# Altium PCB sai.PcbDoc
Units mm, origin at the board's own origin, x right, y up, seen from the top; angles counter-clockwise.
Board outline 152.4 x 101.6 mm, 2 copper layers (Top Layer, Bottom Layer); 31 components, 21 nets, 116 pads, 0 vias.
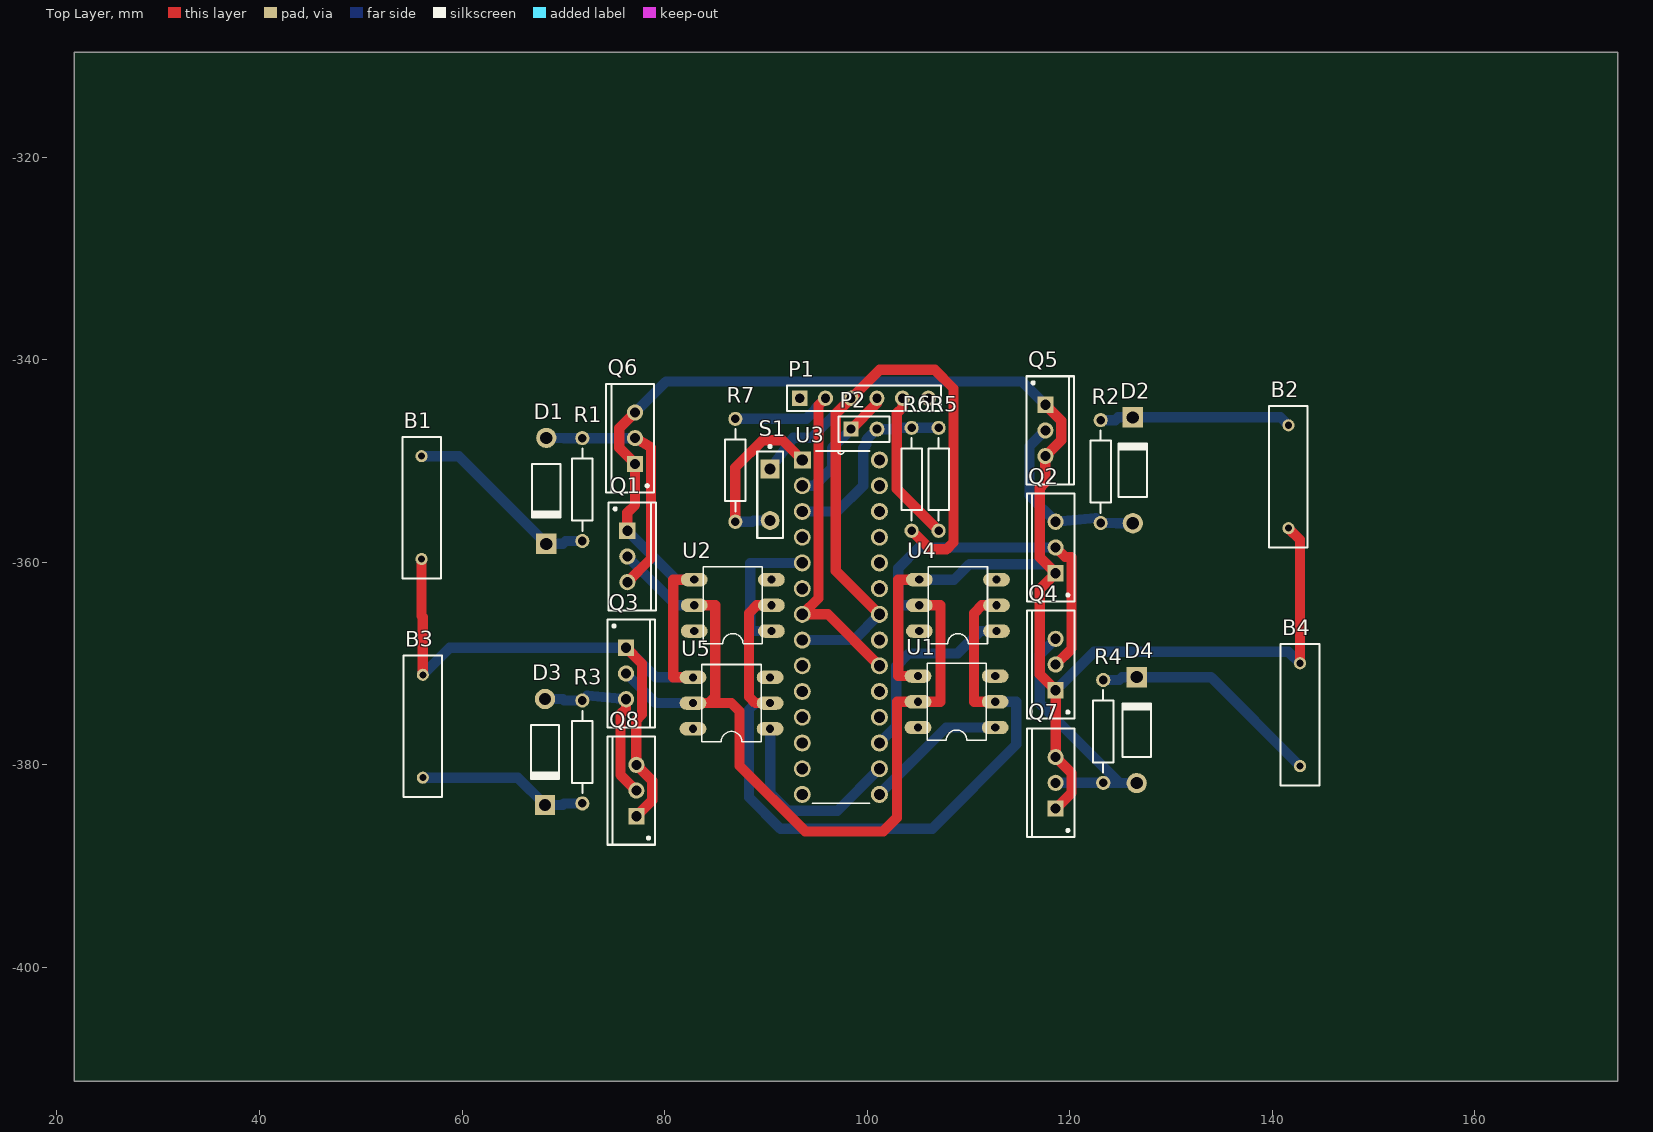
[diagram p0: Top Layer view]
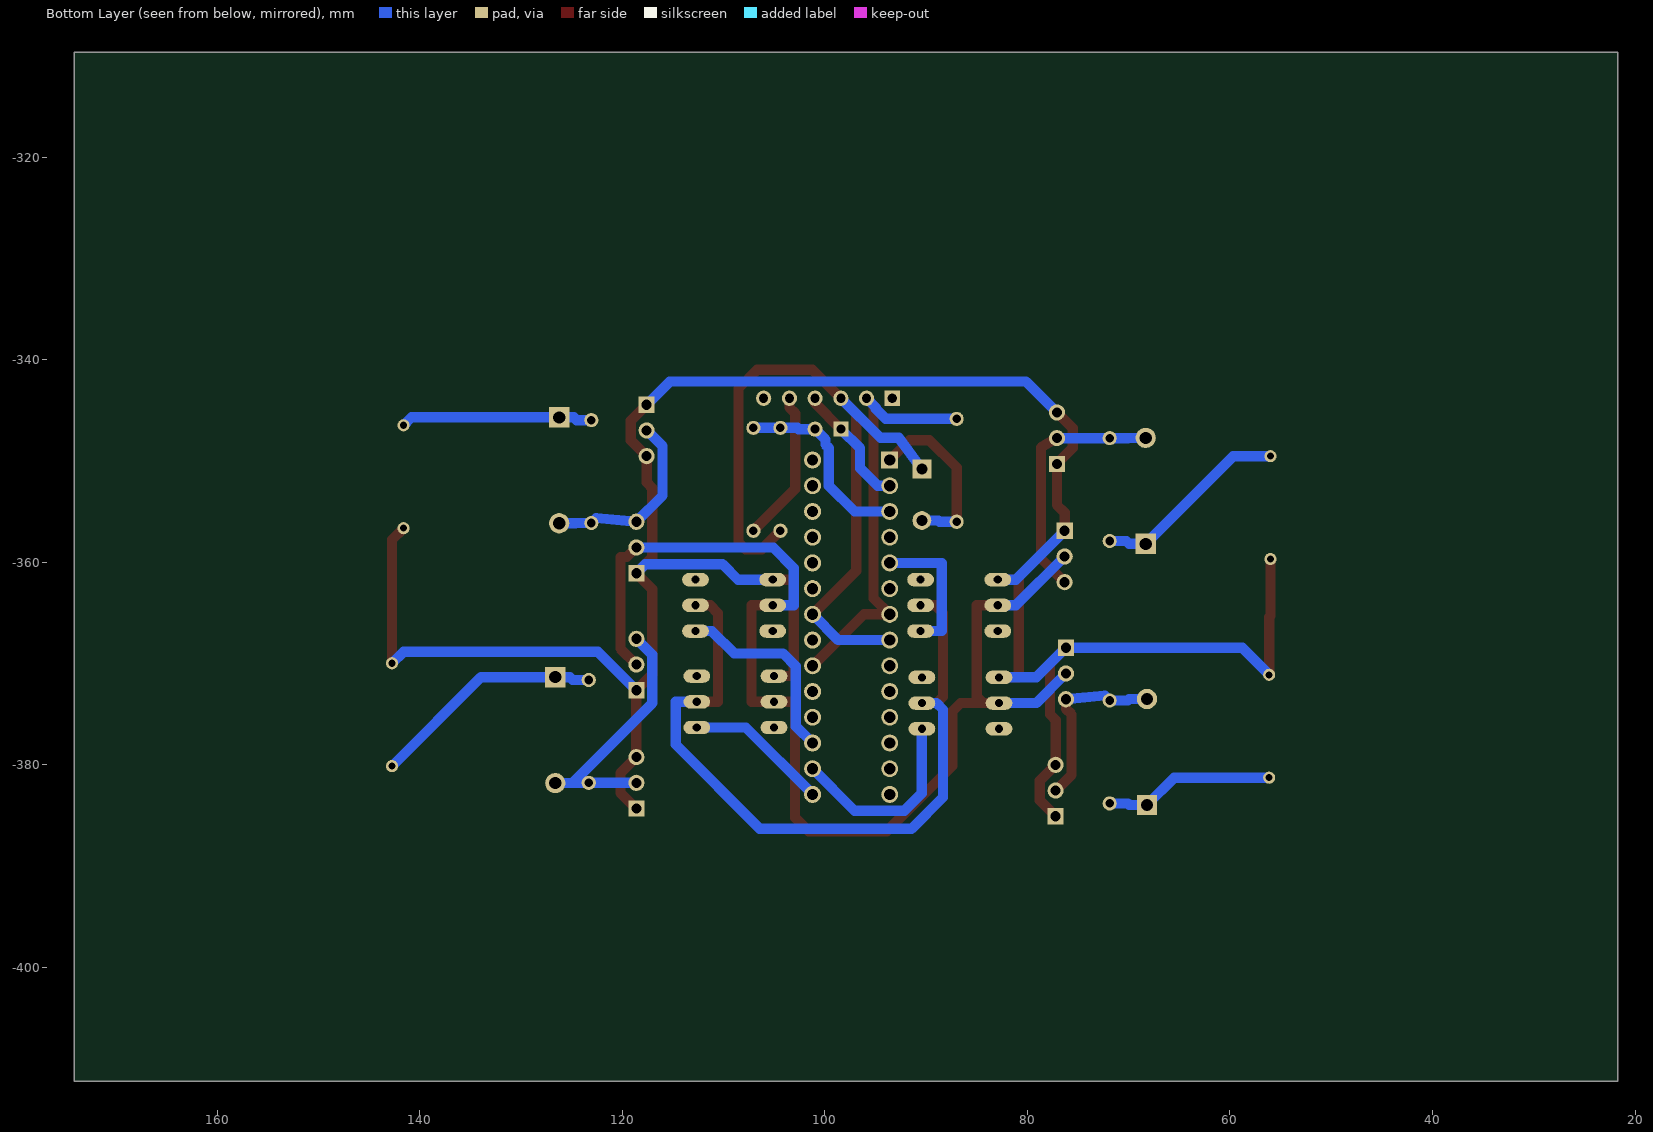
[diagram p1: Bottom Layer view, seen from below]

## Layer stack, top to bottom
Top Solder: solder mask 0.0102, Solder Resist, Dk 3.5
Top Layer: signal copper 0.0356
Dielectric 1: dielectric 0.32, FR-4, Dk 4.8
Bottom Layer: signal copper 0.0356
Bottom Solder: solder mask 0.0102, Solder Resist, Dk 3.5

## Board outline
21.717,-411.226 174.117,-411.226 174.117,-309.626 21.717,-309.626

## Design rules (kind name [scope] priority, off if disabled: settings)
Clearance [All] p1: gap=0.254 ignorepadtopadclearanceinfootprint=FALSE except(0: Arc-Hole Track-Hole SMDPad-Hole THPad-Hole Via-Hole Fill-Hole Poly-Hole Region-Hole Text-Hole)
DiffPairsRouting [All] p1: maxlimit=1 minlimit=0.5 mostfreqgap=0.75 toplayer_minwidth=1 toplayer_maxwidth=2 toplayer_prefwidth=2 bottomlayer_minwidth=1 bottomlayer_maxwidth=2 bottomlayer_prefwidth=2 maxuncoupledlength=12.7
PolygonConnect [All] p1: connectstyle=Relief reliefconductorwidth=0.254 reliefentries=4 polygonreliefangle="90 Angle" airgapwidth=0.254
RoutingVias [All] p1: holewidth=0.711 width=1.27 viastyle="Through Hole" minholewidth=0.711 minwidth=1.27 maxholewidth=0.711 maxwidth=1.27
SolderMaskExpansion [All] p1: expansion=0.102
Width [All] p1: maxlimit=1.016 minlimit=1.016 preferedwidth=1.016
29 further rules are at their usual default settings.

## Components (designator, comment, footprint, x,y, rotation, side; value= is the part's Value field where it differs from the comment)
B1 "Motor Servo" RAD-0.4 56.007,-354.584 r270 top
B2 "Motor Servo" RAD-0.4 141.605,-351.536 r90 top
B3 "Motor Servo" RAD-0.4 56.134,-376.174 r270 top
B4 "Motor Servo" RAD-0.4 142.748,-375.031 r90 top
D1 "Diode 1N4007" DO-41 68.326,-352.933 r270 top
D2 "Diode 1N4007" DO-41 126.238,-350.901 r90 top
D3 "Diode 1N4007" DO-41 68.199,-378.714 r270 top
D4 "Diode 1N4007" DO-41 126.619,-376.555 r90 top
P1 "Header 6" HDR1X6 93.345,-343.789 r0 top
P2 "Header 2" HDR1X2 98.425,-346.837 r0 top
Q1 "PMOS-2" TO-220AB 76.327,-359.41 r270 top
Q2 "PMOS-2" TO-220AB 118.618,-358.521 r90 top
Q3 "PMOS-2" TO-220AB 76.2,-370.967 r270 top
Q4 "PMOS-2" TO-220AB 118.618,-370.078 r90 top
Q5 "NMOS-2" TO-220AB 117.602,-346.964 r270 top
Q6 "NMOS-2" TO-220AB 77.089,-347.726 r90 top
Q7 "NMOS-2" TO-220AB 118.618,-381.762 r90 top
Q8 "NMOS-2" TO-220AB 77.216,-382.524 r90 top
R1 "Res2" AXIAL-0.4 71.882,-352.806 r90 top value=1K
R2 "Res2" AXIAL-0.4 123.063,-351.028 r90 top value=1K
R3 "Res2" AXIAL-0.4 71.882,-378.714 r90 top value=1K
R4 "Res2" AXIAL-0.4 123.317,-376.682 r90 top value=1K
R5 "Res2" AXIAL-0.4 107.061,-351.79 r270 top value=1K
R6 "Res2" AXIAL-0.4 104.394,-351.79 r90 top
R7 "Res2" AXIAL-0.4 86.995,-350.901 r90 top value=1K
S1 "SW-PB" SPST-2 90.424,-353.314 r270 top
U1 "4N35" *DIL06 108.839,-373.761 r90 top
U2 "4N35" *DIL06 86.741,-364.236 r90 top
U3 "ATMEGA328P-PU" *DIP254P762X457-28 101.219,-382.905 r0 top
U4 "4N35" *DIL06 108.966,-364.236 r90 top
U5 "4N35" *DIL06 86.614,-373.888 r90 top

## Footprints (in the part's own frame and the unit in brackets; to place one, negate y for a bottom-side part, rotate by r counter-clockwise, add the part's x,y. Pads: shape width x height; smd on the part's side, far side on the other; paste and mask are expansions set on the pad)
*DIL06 [mil]
  oval 52x104 hole 32: 1(-100,-150) 2(0,-150) 3(100,-150) 4(100,150) 5(0,150) 6(-100,150)
  silkscreen extent -150,-115 150,115
*DIP254P762X457-28 [mil]
  rect 66x66 hole 44: 1(-300,1300)
  round 66 hole 44: 2(-300,1200) 3(-300,1100) 4(-300,1000) 5(-300,900) 6(-300,800) 7(-300,700) 8(-300,600) 9(-300,500) 10(-300,400) 11(-300,300) 12(-300,200) 13(-300,100) 14(-300,0) 15(0,0) 16(0,100) 17(0,200) 18(0,300) 19(0,400) 20(0,500) 21(0,600) 22(0,700) 23(0,800) 24(0,900) 25(0,1000) 26(0,1100) 27(0,1200) 28(0,1300)
  silkscreen extent -262,-35 -38,1335
AXIAL-0.4 [mm] "Axial Device, Thru-Hole; 2 Leads; 0.4 in Pin Spacing"
  round 1.4 hole 0.85: 1(-5.08,0) 2(5.08,0)
  silkscreen extent -4.06,-1.02 4.06,1.02
DO-41 [mm] "Diode, Axial; Body 5.2 x 2.7 mm (LxDia. max), Lead Dia. 0.86 mm (max)"
  round 2 hole 1.2: 1(-5.23,0)
  rect 2x2 hole 1.2: 2(5.23,0)
  silkscreen extent -2.65,-1.4 2.75,1.4
HDR1X2 [mm] "Connector; Header; 2 Position"
  rect 1.5x1.5 hole 0.9: 1(0,0)
  round 1.5 hole 0.9: 2(2.54,0)
  silkscreen extent -1.27,-1.27 3.81,1.27
HDR1X6 [mm] "Connector; Header; 6 Position"
  rect 1.5x1.5 hole 0.9: 1(0,0)
  round 1.5 hole 0.9: 2(2.54,0) 3(5.08,0) 4(7.62,0) 5(10.16,0) 6(12.7,0)
  silkscreen extent -1.27,-1.27 13.97,1.27
RAD-0.4 [mm] "Radial Cap, Thru-Hole; 2 Leads; 0.4 in Pin Spacing"
  round 1.2 hole 0.7: 1(-5.08,0) 2(5.08,0)
  silkscreen extent -6.98,-1.91 6.98,1.91
SPST-2 [mm] "Switch; 2 Leads"
  rect 1.85x1.85 hole 1.1: 1(-2.54,0)
  round 1.85 hole 1.1: 2(2.54,0)
  silkscreen extent -4.89,-1.27 4.28,1.27
TO-220AB [mm] "TO, Thru-Hole, Vertical, Heatsink Mounted; 3 In-Line Leads; Pitch 2.54 mm"
  rect 1.6x1.6 hole 1: 1(-2.54,0)
  round 1.6 hole 1: 2(0,0) 3(2.54,0)
  silkscreen extent -5.35,-1.85 5.35,2.85, body extent -5.4,-1.9 5.4,2.9, height 19.3

## Part data
B1 B2 B3 B4: "Servo Motor", LatestRevisionDate=17-Jul-2002, LatestRevisionNote="Re-released for DXP Platform.", PackageDescription="Radial Cap, Thru-Hole; 2 Leads; 0.4 in Pin Spacing", PackageReference=RAD-0.4, Published=24-Mar-1999, Publisher="Altium Limited"
D1 D2 D3 D4: "1 Amp General Purpose Rectifier", Code_JEDEC=DO-204-AL, ComponentLink1Description="Manufacturer Link", ComponentLink1URL=http://www.fairchildsemi.com/, ComponentLink2Description=Datasheet, ComponentLink2URL=http://www.fairchildsemi.com/ds/1N%2F1N4001.pdf, DatasheetVersion=1998, LatestRevisionDate=17-Jul-2002, LatestRevisionNote="Re-released for DXP Platform.", PackageDescription="Diode, Axial; Body 5.2 x 2.7 mm (LxDia. max), Lead Dia. 0.86 mm (max)", PackageReference=DO-41, PackageVersion=Aug-1999, Published=8-Jun-2000, Publisher="Altium Limited"
P1: "Header, 6-Pin", LatestRevisionDate=17-Jul-2002, LatestRevisionNote="Re-released for DXP Platform.", Publisher="Altium Limited"
P2: "Header, 2-Pin", LatestRevisionDate=17-Jul-2002, LatestRevisionNote="Re-released for DXP Platform.", Publisher="Altium Limited"
Q1 Q2 Q3 Q4: "P-Channel Power MOSFET", ComponentLink1Description="Manufacturer Link", ComponentLink1URL=http://www.irf.com/, DatasheetVersion=PD-9.390D, LatestRevisionDate=17-Jul-2002, LatestRevisionNote="Re-released for DXP Platform.", Note="Pin 4 not drawn and electrically connected to Pin 2.", PackageDescription="TO, Thru-Hole, Vertical, Heatsink Mounted; 3 In-Line Leads; Pitch 2.54 mm", PackageReference=TO-220AB, PackageVersion=Feb-1997, Published=8-Jun-2000, Publisher="Altium Limited"
Q5 Q6 Q7 Q8: "N-Channel Power MOSFET", ComponentLink1Description="Manufacturer Link", ComponentLink1URL=http://www.irf.com/, DatasheetVersion=PD-9.814, LatestRevisionDate=17-Jul-2002, LatestRevisionNote="Re-released for DXP Platform.", Note="Pin 2 is electrically connected to pin 4.", PackageDescription="TO, Thru-Hole, Vertical, Heatsink Mounted; 3 In-Line Leads; Pitch 2.54 mm", PackageReference=TO-220AB, PackageVersion=Feb-1997, Published=8-Jun-2000, Publisher="Altium Limited"
R1 R2 R3 R4 R5 R6 R7: "Resistor", LatestRevisionDate=17-Jul-2002, LatestRevisionNote="Re-released for DXP Platform.", PackageDescription="Axial Device, Thru-Hole; 2 Leads; 0.4 in Pin Spacing", PackageReference=AXIAL-0.4, Published=8-Jun-2000, Publisher="Altium Limited"
S1: "Switch", LatestRevisionDate=17-Jul-2002, LatestRevisionNote="Re-released for DXP Platform.", PackageDescription="Switch; 2 Leads", PackageReference=SPST-2, Published=24-Mar-1999, Publisher="Altium Limited"
U1 U2 U4 U5: "Optoisolator; Analog; 6-Pin DIP; Transistor; 6 PIN SINGLE; 100% CTR;", Package="DIP-6 Infineon", Availability=Unavailable, MF="Vishay Semiconductor", MP=4N35, Price=None, SnapEDA_Link=https://www.snapeda.com/parts/4N35/Vishay%20Semiconductor%20Opto%20Division/view-part/?ref=snap
U3: "Embedded microcontroller ATMEGA328P-PU PDIP 28 Microchip Technology 8-Bit 20 MHz I/O number 23", Package="PDIP-28 Microchip", Availability=Unavailable, MF=Microchip, MP=ATMEGA328P-PU, Price=None, SnapEDA_Link=https://www.snapeda.com/parts/ATMEGA328P-PU/Microchip/view-part/?ref=snap

## Nets (pads, with @x,y where several pads share a name; then routed paths per layer and width w, separated by ;. In a path a pad name is that pad's centre, name@x,y a point inside that pad or via, vN(x,y) a via of type N, cw(c..) or ccw(c..) an arc to the next point about the centre after c; other vN are vias at no path point)
NetB1_1: B1.1 D1.2 R1.1 | length 19.6
  Bottom Layer w1.016: B1.1 59.667,-349.504 D1.2 69.952,-358.163 70.229,-357.886 R1.1
NetB1_2: B1.2 B2.1 B3.1 B4.2 Q1.1 Q2.1 Q3.1 Q4.1 Q5.1 Q5.3 Q6.1 Q6.3 Q7.1 Q7.3 Q8.1 Q8.3 U1.4 U2.4 U4.4 U5.4 | length 250.3
  Top Layer w1.016: B1.2 56.007,-365.252 56.134,-365.379 B3.1 ; Q3.1 77.775,-370.002 77.775,-375.006 77.216,-375.564 Q8.3 78.791,-381.559 78.791,-383.489 Q8.1 ; Q1.1 76.327,-355.092 77.089,-354.33 Q6.1 75.514,-348.691 75.514,-346.761 Q6.3 ; U5.4 80.848,-371.348 80.848,-361.696 U2.4 ; U1.4 103.073,-371.221 103.073,-361.696 U4.4 ; Q5.1 119.177,-345.999 119.177,-347.929 Q5.3 117.602,-352.095 117.043,-352.654 117.043,-359.486 Q2.1 117.043,-362.636 117.043,-371.043 Q4.1 Q7.3 120.193,-380.797 120.193,-382.727 Q7.1 ; B2.1 142.748,-357.759 B4.2
  Bottom Layer w1.016: B3.1 58.801,-368.427 Q3.1 79.121,-371.348 U5.4 ; Q1.1 81.153,-361.696 U2.4 ; Q6.3 80.137,-342.138 115.316,-342.138 Q5.1 ; U4.4 108.579,-361.696 110.103,-360.172 117.729,-360.172 Q2.1 ; Q4.1 122.428,-368.808 141.605,-368.808 B4.2
NetB2_2: B2.2 D2.2 R2.2 | length 19
  Bottom Layer w1.016: R2.2 124.511,-345.948 124.788,-345.671 D2.2 140.82,-345.671 B2.2
NetB3_2: B3.2 D3.2 R3.1 | length 16.9
  Bottom Layer w1.016: B3.2 65.509,-381.254 D3.2 69.952,-383.944 70.102,-383.794 R3.1
NetB4_1: B4.1 D4.2 R4.2 | length 23.2
  Bottom Layer w1.016: R4.2 124.916,-371.602 125.193,-371.325 D4.2 133.962,-371.325 B4.1
NetD1_1: D1.1 Q1.3 Q6.2 R1.2 | length 24.9
  Top Layer w1.016: Q1.3 78.664,-359.613 78.664,-348.666 Q6.2
  Bottom Layer w1.016: D1.1 70.079,-347.703 70.102,-347.726 R1.2 Q6.2
NetD2_1: D2.1 Q2.3 Q5.2 R2.1 | length 18.6
  Bottom Layer w1.016: Q5.2 116.027,-348.539 116.027,-353.39 Q2.3 122.568,-355.613 R2.1 124.638,-356.108 124.661,-356.131 D2.1
NetD3_1: D3.1 Q3.3 Q8.2 R3.2 | length 18.2
  Top Layer w1.016: Q3.3 76.2,-374.447 75.641,-375.006 75.641,-380.949 Q8.2
  Bottom Layer w1.016: D3.1 69.952,-373.484 70.102,-373.634 R3.2 72.377,-373.139 Q3.3
NetD4_1: D4.1 Q4.3 Q7.2 R4.1 | length 26.2
  Bottom Layer w1.016: Q7.2 R4.1 124.917,-381.762 ; Q4.3 117.043,-369.113 117.043,-373.888 124.917,-381.762 ; D4.1 124.966,-381.785 ; 124.917,-381.762 124.943,-381.762 124.966,-381.785 ; 124.917,-381.762 124.94,-381.785 124.966,-381.785
NetP1_2: P1.2 R7.2 U3.7 U3.20 | length 41.8
  Top Layer w1.016: P1.2 95.199,-344.475 95.199,-363.525 U3.7 96.139,-365.125 U3.20
  Bottom Layer w1.016: R7.2 93.98,-345.821 94.971,-344.83 94.971,-344.703 P1.2
NetP1_3: P1.3 R6.1 S1.1 U3.8 U3.22 | length 76
  Top Layer w1.016: U3.22 96.901,-360.807 96.901,-345.313 P1.3 101.244,-340.97 106.68,-340.97 108.534,-342.824 108.534,-358.013 107.848,-358.699 106.223,-358.699 R6.1
  Bottom Layer w1.016: S1.1 92.71,-347.701 94.513,-347.701 P1.3 ; U3.8 98.679,-367.665 U3.22
NetP1_4: P1.4 P2.1 U3.2 | length 12.4
  Top Layer w1.016: P2.1 100.965,-344.297 P1.4
  Bottom Layer w1.016: U3.2 94.793,-352.425 96.529,-350.689 96.529,-348.733 P2.1
NetP1_5: P1.5 R5.2 | length 15
  Top Layer w1.016: P1.5 103.505,-344.703 102.921,-345.288 102.921,-352.73 R5.2
NetP2_2: P2.2 R5.1 R6.2 U3.3 | length 19.4
  Bottom Layer w1.016: U3.3 97.079,-354.965 99.619,-352.425 99.619,-348.691 99.949,-348.361 99.949,-347.853 P2.2 102.616,-346.837 102.743,-346.71 R6.2 R5.1
NetQ1_2: Q1.2 Q2.2 Q3.2 Q4.2 U1.5 U2.5 U4.5 U5.5 | length 120.3
  Top Layer w1.016: U5.5 84.379,-373.888 ; U2.5 85.014,-364.236 85.014,-373.253 84.379,-373.888 ; U4.5 107.239,-364.236 107.239,-373.761 U1.5 102.946,-373.761 102.946,-385.216 101.6,-386.563 93.904,-386.563 87.401,-380.06 87.401,-374.675 86.614,-373.888 84.379,-373.888 ; Q4.2 120.193,-368.503 120.193,-359.461 119.558,-359.461 Q2.2
  Bottom Layer w1.016: Q3.2 79.121,-373.888 U5.5 ; Q1.2 81.153,-364.236 U2.5 ; U4.5 103.073,-364.236 103.073,-360.553 105.105,-358.521 Q2.2
NetR7_1: R7.1 S1.2 U3.1 | length 17.4
  Top Layer w1.016: R7.1 86.995,-350.622 89.687,-347.929 91.643,-347.929 U3.1
  Bottom Layer w1.016: R7.1 88.646,-355.981 88.773,-355.854 S1.2
NetU1_1: U1.1 U3.15 | length 14.2
  Bottom Layer w1.016: U3.15 107.823,-376.301 U1.1
NetU1_2: U1.2 U2.2 U4.2 U5.2 | length 74.9
  Top Layer w1.016: U5.2 88.976,-373.888 88.341,-373.253 88.341,-364.998 89.103,-364.236 U2.2 ; U1.2 110.566,-373.761 110.566,-364.998 111.328,-364.236 U4.2
  Bottom Layer w1.016: U5.2 88.976,-373.888 88.341,-374.523 88.341,-383.184 91.44,-386.283 106.426,-386.283 114.732,-377.977 114.732,-373.761 U1.2
NetU2_1: U2.1 U3.5 | length 13.9
  Bottom Layer w1.016: U2.1 88.468,-366.776 88.468,-360.045 U3.5
NetU3_16: U3.16 U5.1 | length 19.6
  Bottom Layer w1.016: U5.1 90.424,-382.778 92.151,-384.505 97.079,-384.505 U3.16
NetU3_17: U3.17 U4.1 | length 19.6
  Bottom Layer w1.016: U3.17 102.87,-376.174 102.87,-370.256 104.14,-368.986 108.966,-368.986 111.176,-366.776 U4.1
pads on no net: P1.1 P1.6 U1.3 U1.6 U2.3 U2.6 U3.4 U3.6 U3.9 U3.10 U3.11 U3.12 U3.13 U3.14 U3.18 U3.19 U3.21 U3.23 U3.24 U3.25 U3.26 U3.27 U3.28 U4.3 U4.6 U5.3 U5.6